# Altium PCB AIRZAI_LED_SENSE_FLEX_REVA.PcbDoc (part 1 of 2)
Units mil, origin at the board's own origin, x right, y up, seen from the top; angles counter-clockwise.
Board outline 2968.82 x 4325.31 mil, 2 copper layers (Top Layer, Bottom Layer); 51 components, 38 nets, 146 pads, 75 vias.
Unrouted connection lines stored in the file: 65.
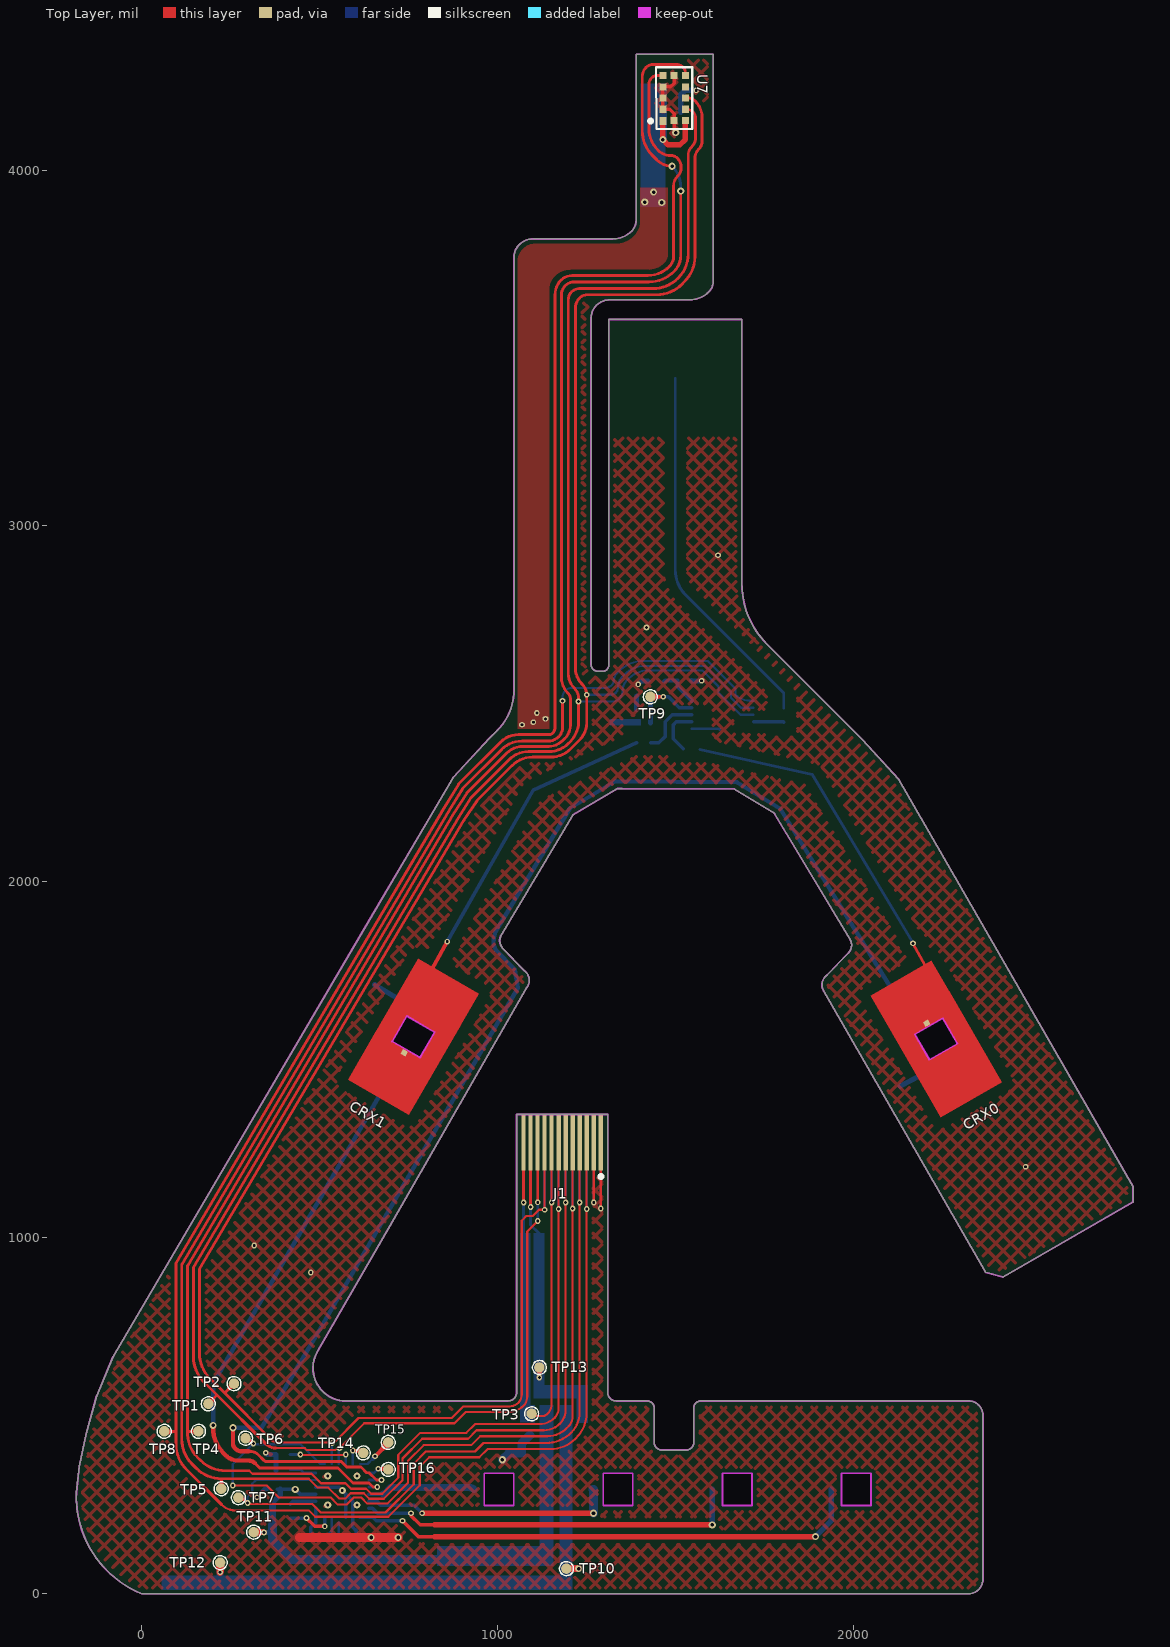
[diagram p0: Top Layer view]
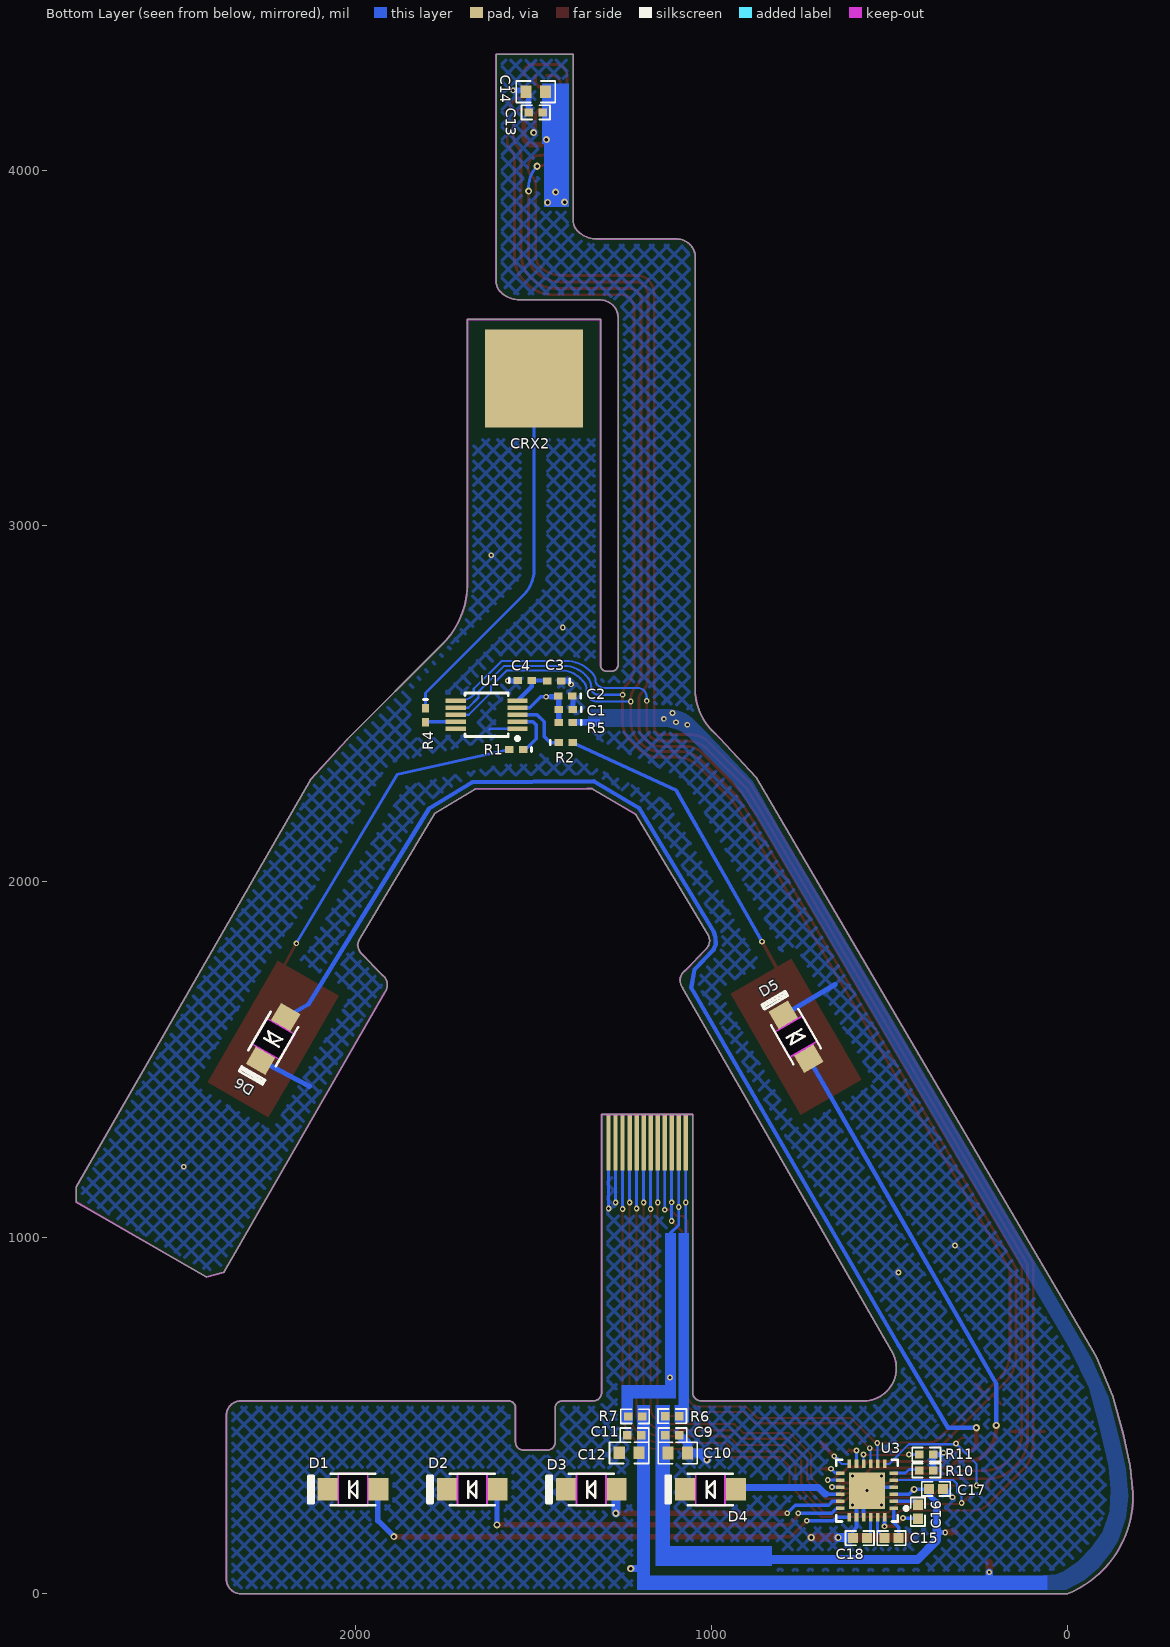
[diagram p1: Bottom Layer view, seen from below]
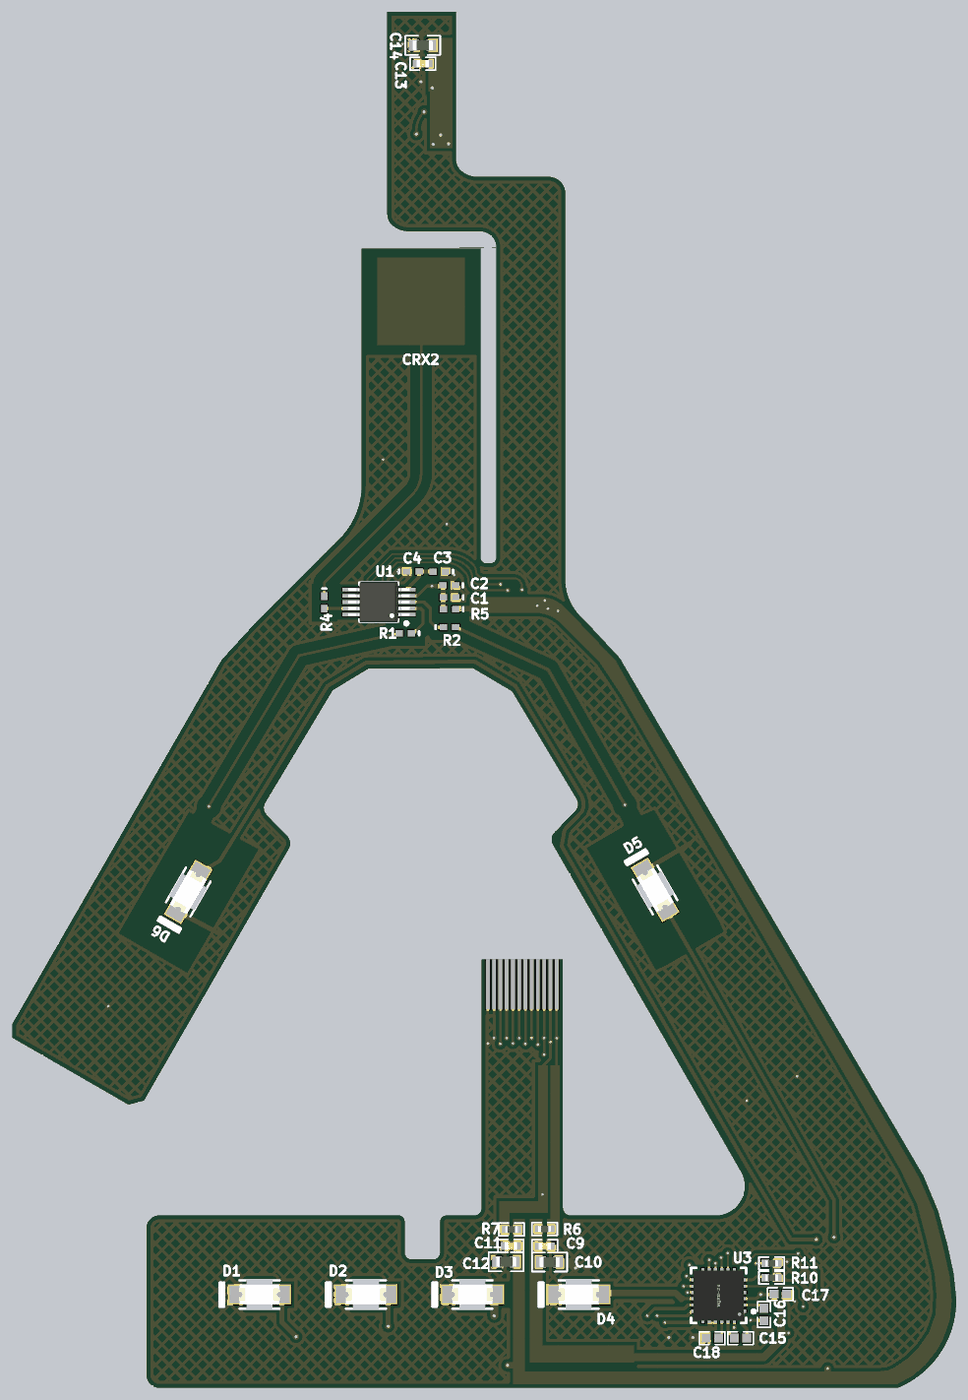
[diagram p3: 3D render of the assembled board from below, using the file's embedded part models]

## Layer stack, top to bottom
Top Solder: solder mask 0.4, Solder Resist, Dk 3.5
Top Layer: signal copper 1.4
Dielectric 1: dielectric 12.6, FR-4, Dk 4.8
Bottom Layer: signal copper 1.4
Bottom Solder: solder mask 0.4, Solder Resist, Dk 3.5

## Board outline
0,0.05 cw(c111.74,273.59) -183.56,283.87 -175.82,357.67 -155.82,450.67 -126.82,555.67 -80.5,666.24 653.96,1917.4 874.71,2293.44 977.95,2404.51 997.98,2424.54 ccw(c882.06,2540.46) 1045.99,2540.46 1045.99,2566.43 1045.99,3755.43 cw(c1095.33,3755.43) 1060.44,3790.31 cw(c1099.07,3751.69) 1099.07,3806.31 1323.33,3806.31 ccw(c1323.33,3881.43) 1376.44,3828.31 ccw(c1346.14,3858.61) 1388.99,3858.61 1388.99,4325.31 1605.53,4325.31 1605.53,3687.73 cw(c1562.68,3687.73) 1592.98,3657.43 cw(c1539.87,3710.54) 1539.87,3635.43 1315.61,3635.43 ccw(c1315.61,3580.8) 1276.98,3619.43 ccw(c1311.86,3584.55) 1262.53,3584.55 1262.53,2609.67 ccw(c1281.62,2610.76) 1279.79,2591.73 1296.42,2591.73 ccw(c1295.22,2608.47) 1311.97,2609.67 1311.97,3580.15 1685.99,3580.15 1685.99,2838.32 ccw(c1927.41,2838.32) 1756.7,2667.61 2024.31,2400 2126.58,2288.04 2344.06,1910.1 2785.18,1143.49 2785.18,1100.61 2420.99,890.99 2419.21,889.97 2371.12,902.93 1917.64,1691.01 cw(c1945.14,1710.92) 1925.23,1738.42 1985.58,1800.55 1991.58,1809.55 1994.58,1822.55 1991.58,1835.55 1777.54,2192.62 1664.98,2260.71 1349.99,2262.07 1342.93,2262.11 1335.87,2262.03 1212.79,2189.33 1008.19,1848.01 1008.24,1847.99 1005.24,1834.99 1008.24,1821.99 1014.24,1812.99 1074.59,1750.85 cw(c1054.68,1723.35) 1082.18,1703.45 697.75,1035.36 495.3,683.53 ccw(c574.01,634.2) 563.5,541.91 625.45,541.91 625.68,541.67 1029.79,541.67 ccw(c1029.3,565.55) 1053.18,566.03 1053.18,1346.67 1309.08,1346.67 1309.08,565.67 ccw(c1332.96,565.55) 1332.84,541.67 1419.87,541.67 cw(c1419.91,522.02) 1439.56,522.05 1439.56,425.37 ccw(c1461.52,425.64) 1461.79,403.67 1528.87,403.67 ccw(c1529.14,425.64) 1551.1,425.37 1551.1,522.05 cw(c1570.87,522.14) 1570.79,541.91 2321.18,541.91 2323.18,541.91 cw(c2323.18,501.91) 2363.18,501.91 2363.18,41 cw(c2322.18,41) 2322.18,0 2098.42,0
cut-out: 1966.13,247.95 2048.8,247.95 2048.8,338.5 1966.13,338.5
cut-out: 1631.48,247.95 1714.16,247.95 1714.16,338.51 1631.48,338.51
cut-out: 1296.83,247.95 1379.51,247.95 1379.51,338.5 1296.83,338.5
cut-out: 962.19,247.95 1044.87,247.95 1044.87,338.5 962.19,338.5
cut-out: 2213.11,1500.42 2172.02,1571.8 2250.49,1616.98 2291.59,1545.6
cut-out: 703.37,1551.94 781.85,1506.76 822.94,1578.13 744.47,1623.32
board region "Layer Stack Region 1": 1053.18,1188 1053.18,1346.67 1309.09,1346.67 1309.09,1187.77
board region "Layer Stack Region 1": 1388.99,4086 1388.99,4325.31 1605.53,4325.31 1605.53,4087
board region "fpc 2": 1309.09,639 1309.09,565.67 1309.32,563.21 1052.86,562.01 1053.18,566.03 1053.18,638.95
board region "fpc 1": 1053.18,1110.93 1053.18,1188 1309.09,1187.77 1309.09,1111
board region "Layer Stack Region 1": 1309.09,1111 1309.09,639 1053.18,638.95 1053.18,1110.93
board region "Layer Stack Region 1": 1311.97,3257 1311.97,3580.15 1685.99,3580.15 1685.99,3257
board region "electrode 2": 1685.99,2880 1685.99,2838.32 1686.28,2826.48 1688.6,2802.9 1693.22,2779.66 1700.1,2756.99 1700.14,2756.88 1311.97,2758.77 1311.97,2884.99
board region "electrode 1": 1311.97,3164 1311.97,3257 1685.99,3257 1685.99,3164
board region "Layer Stack Region 1": 1685.99,3164 1685.99,2880 1311.97,2884.99 1311.97,3164
board region Sensor: 1388.99,4006 1388.99,4086 1605.53,4087 1605.53,4006
board region "Layer Stack Region 1": 1605.53,4006 1605.53,3687.73 1605.53,3683.51 1603.88,3675.23 1600.65,3667.43 1595.96,3660.41 1592.98,3657.43 1587.75,3652.2 1575.45,3643.98 1561.78,3638.32 1547.26,3635.43 1539.87,3635.43 1315.61,3635.43 1310.25,3635.17 1299.75,3633.08 1289.86,3628.98 1280.95,3623.03 1276.98,3619.43 1273.73,3615.84 1268.36,3607.8 1264.65,3598.87 1262.77,3589.38 1262.53,3584.55 1262.53,2609.67 1263.02,2606.32 1265.72,2600.14 1270.39,2595.28 1276.47,2592.35 1279.79,2591.73 1296.42,2591.73 1299.67,2592.28 1305.52,2595.22 1309.81,2600.17 1311.88,2606.38 1311.97,2609.67 1311.97,2758.77 1700.14,2756.89 1709.17,2735.1 1720.33,2714.21 1733.5,2694.51 1748.53,2676.19 1756.7,2667.61 2024.31,2400 2126.59,2288.04 2344.06,1910.1 2785.18,1143.49 2785.18,1100.61 2420.99,890.99 2419.21,889.97 2371.12,902.93 1917.64,1691.01 1915.68,1693.72 1912.89,1699.8 1911.34,1706.3 1911.09,1712.98 1912.14,1719.59 1914.47,1725.86 1917.97,1731.55 1922.52,1736.46 1925.23,1738.42 1985.57,1800.55 1991.57,1809.55 1994.57,1822.55 1991.57,1835.55 1777.54,2192.62 1664.98,2260.71 1349.99,2262.07 1342.93,2262.11 1335.87,2262.03 1212.79,2189.33 1008.24,1847.98 1005.24,1834.99 1008.24,1821.99 1014.24,1812.99 1074.59,1750.85 1077.3,1748.89 1081.84,1743.99 1085.35,1738.29 1087.67,1732.02 1088.73,1725.42 1088.48,1718.74 1086.93,1712.23 1084.14,1706.15 1082.18,1703.45 697.75,1035.36 495.3,683.53 491.43,676.75 485.48,662.33 482.02,647.13 481.16,631.55 482.91,616.06 487.23,601.07 494,587.02 503.02,574.29 514.04,563.26 526.76,554.23 540.8,547.45 555.78,543.12 563.5,541.91 625.68,541.67 1029.79,541.67 1034.44,542.22 1042.97,545.96 1049.42,552.69 1052.81,561.37 1052.86,562.01 1309.31,563.21 1309.52,561.01 1313.04,552.39 1319.59,545.76 1328.18,542.15 1332.84,541.67 1419.87,541.67 1423.78,541.68 1431.01,538.7 1436.55,533.18 1439.55,525.96 1439.56,522.05 1439.56,425.37 1440.03,421.09 1443.41,413.21 1449.54,407.23 1457.5,404.04 1461.79,403.67 1528.87,403.67 1533.16,404.04 1541.12,407.23 1547.25,413.21 1550.63,421.09 1551.1,425.37 1551.1,522.05 1551.08,525.98 1554.06,533.26 1559.6,538.85 1566.85,541.89 1570.79,541.91 2321.18,541.91 2323.18,541.91 2327.12,541.91 2334.85,540.37 2342.13,537.36 2348.68,532.98 2354.25,527.41 2358.63,520.85 2361.64,513.57 2363.18,505.85 2363.18,501.91 2363.18,41 2363.18,36.96 2361.6,29.04 2358.51,21.58 2354.03,14.86 2348.32,9.15 2341.6,4.67 2334.14,1.58 2326.22,0 2322.18,0 2098.42,0 0,0.05 -13.89,5.73 -40.38,19.83 -65.31,36.55 -88.41,55.7 -109.45,77.1 -128.22,100.52 -144.52,125.72 -158.18,152.44 -169.07,180.41 -177.06,209.34 -182.09,238.93 -184.08,268.87 -183.56,283.87 -175.82,357.67 -155.82,450.67 -126.82,555.67 -80.5,666.24 653.96,1917.4 874.71,2293.44 977.95,2404.51 997.98,2424.54 1003.53,2430.37 1013.73,2442.81 1022.67,2456.18 1030.25,2470.37 1036.41,2485.23 1041.08,2500.63 1044.22,2516.41 1045.8,2532.42 1045.99,2540.46 1045.99,2566.43 1045.99,3755.43 1045.99,3760.29 1047.89,3769.82 1051.61,3778.8 1057.01,3786.88 1060.44,3790.31 1064.25,3794.12 1073.19,3800.1 1083.14,3804.21 1093.69,3806.31 1099.07,3806.31 1323.33,3806.31 1330.69,3806.68 1345.13,3809.55 1358.74,3815.18 1370.98,3823.36 1376.44,3828.31 1379.27,3831.43 1383.93,3838.41 1387.15,3846.18 1388.79,3854.41 1388.99,3858.61 1388.99,4006

## Design rules (kind name [scope] priority, off if disabled: settings)
Clearance Clearance_Board_Cutout_Electrodes [(InComponent('CRX0') OR InComponent('CRX1')) vs OnLayer('Multi-Layer')] p1: gap=0 ignorepadtopadclearanceinfootprint=FALSE
Clearance Clearance_Board_Cutout_Diodes [(InComponent('D1') OR InComponent('D2') OR InComponent('D3') OR InComponent('D4') OR InComponent('D5') OR InComponent('D6')) vs OnLayer('Multi-Layer')] p2: gap=0 ignorepadtopadclearanceinfootprint=FALSE
Clearance Clearance_Keepout [(OnLayer('Keep-Out Layer')) vs (InComponent('D1') OR InComponent('D2') OR InComponent('D3') OR InComponent('D4') OR InComponent('D5') OR InComponent('D6') OR InComponent('CRX0') OR InComponent('CRX1') OR InComponent('J1'))] p3: gap=0 ignorepadtopadclearanceinfootprint=FALSE
Clearance Clearance_GND_POLY_ELECTRODE [(InComponent('CRX0') OR InComponent('CRX1') OR InComponent('CRX2') OR InNet('NetCRX0_1') OR InNet('NetCRX1_1') OR InNet('NetCRX2_1') OR InNet('NetR4_2') OR InNet('NetR2_1') OR InNet('NetR1_1')) vs (InNet('GND') AND InPolygon)] p4: gap=30 ignorepadtopadclearanceinfootprint=FALSE
Clearance Clearance_POLYGON_KEEPOUT [(OnLayer('Keep-Out Layer')) vs (InNet('GND') AND InPolygon)] p5: gap=10 ignorepadtopadclearanceinfootprint=FALSE
Clearance Clearance_GND_POLY_REST [All vs (InNet('GND') AND InPolygon)] p6: gap=10 ignorepadtopadclearanceinfootprint=FALSE
Clearance [All] p7: gap=6 ignorepadtopadclearanceinfootprint=FALSE
MinimumSolderMaskSliver [All] p1: minsoldermaskwidth=1
PolygonConnect [All] p1: connectstyle=Direct reliefconductorwidth=10 reliefentries=4 polygonreliefangle="90 Angle" airgapwidth=10
RoomDefinition AIRZAI_LED_SENSE_FLEX_REVA [InComponentClass('AIRZAI_LED_SENSE_FLEX_REVA')] p1: confinementstyle=ConfineIn formatcopy=TRUE lockcomponents=FALSE outline -5819.02,-4170.05 8840.98,-4170.05 8840.98,5429.95 -5819.02,5429.95
RoutingVias [All] p1: holewidth=28 width=50 viastyle="Through Hole" minholewidth=8 minwidth=16 maxholewidth=28 maxwidth=50
SilkToSilkClearance [All] p1: silktosilkclearance=1
SilkToSolderMaskClearance [IsPad] p1: minsilkscreentomaskgap=2 clearancetoexposedcopper=TRUE
SolderMaskExpansion [All] p1: expansion=4
Width [All] p1: maxlimit=100 minlimit=6 preferedwidth=10
27 further rules are at their usual default settings.

## Components (designator, comment, footprint, x,y, rotation, side; value= is the part's Value field where it differs from the comment)
C1 "CAP 1uF 16V 0402(1005)" 0402-A 1409.86,2484.27 r0 bottom value=1uF
C2 "CAP 100pF 25V 0402(1005)" 0402-A 1410.84,2522.37 r0 bottom value=100pF
C3 "CAP 1uF 16V 0402(1005)" 0402-A 1442.14,2564.98 r0 bottom value=1uF
C4 "CAP 100pF 25V 0402(1005)" 0402-A 1525.17,2565.54 r180 bottom value=100pF
C9 "0.1µF" 0402CAP 1110.18,445.48 r180 bottom
C10 "10µF" 0603 1095.18,395.48 r180 bottom
C11 "0.1µF" 0402CAP 1216.98,445.95 r0 bottom
C12 "10µF" 0603 1231.98,395.95 r0 bottom
C13 "0.1µF" 0402CAP 1494.18,4161.67 r0 bottom
C14 "4.7µF" 0603 1494.18,4219.67 r180 bottom
C15 "CAP 1uF 16V 0402(1005)" CAPC0402(1005)60_M 494.55,156.37 r0 bottom value=1uF
C16 "CAP 1uF 16V 0402(1005)" CAPC0402(1005)60_M 420.68,230.43 r270 bottom value=1uF
C17 "CAP 1uF 16V 0402(1005)" CAPC0402(1005)60_M 369.5,294.6 r0 bottom value=1uF
C18 "CAP 1uF 16V 0402(1005)" CAPC0402(1005)60_M 583.55,156.37 r0 bottom value=1uF
CRX0 "CONTACT POINT 1" "CONTACT_POINT_1CM _SQ" 2231.8,1558.7 r300 top
CRX1 "CONTACT POINT 2" "CONTACT_POINT_1CM _SQ" 763.16,1565.04 r60 top locked
CRX2 "CONTACT POINT 3" CONTACT_POINT_0.7CM 1498.97,3414.67 r90 bottom
D1 "WHITE" LED1206_LTW-C230DS 2007.46,293.23 r0 bottom locked
D2 "WHITE" LED1206_LTW-C230DS 1672.82,293.23 r0 bottom locked
D3 "WHITE" LED1206_LTW-C230DS 1338.17,293.23 r0 bottom locked
D4 "WHITE" LED1206_LTW-C230DS 1003.53,293.23 r0 bottom locked
D5 "WHITE" LED1206_LTW-C230DS 763.16,1565.04 r60 bottom
D6 "WHITE" LED1206_LTW-C230DS 2231.8,1558.7 r300 bottom
J1 "FFC Pads" FFC_Pads 1181.13,1267.93 r0 top
R1 "470R" 0402-A 1548.98,2371.95 r0 bottom
R2 "470R" 0402-A 1409.98,2390.95 r180 bottom
R4 "470R" 0402-A 1803.85,2468.72 r270 bottom
R5 "43 R 1% 0402(1005)" 0402-A 1409.86,2447.46 r0 bottom value="43 R"
R6 "0R" 0402 1110.96,499.02 r180 bottom
R7 "0R" 0402 1215.07,498.18 r0 bottom
R10 "Jumper 0402(1005)" 0402 396.66,346.36 r0 bottom value=0R
R11 "Jumper 0402(1005)" 0402 396.66,391.36 r0 bottom value=0R
TP1 "Test Point" TP_0.9MM 187.18,533.67 r90 top
TP2 "Test Point" TP_0.9MM 259.18,590.46 r90 top
TP3 "Test Point" TP_0.9MM 1095.18,505.67 r90 top
TP4 "Test Point" TP_0.9MM 159.18,456.41 r90 top
TP5 "Test Point" TP_0.9MM 223.18,295.2 r90 top
TP6 "Test Point" TP_0.9MM 291.55,437.2 r90 top
TP7 "Test Point" TP_0.9MM 271.55,270.2 r90 top
TP8 "Test Point" TP_0.9MM 63.18,456.41 r90 top
TP9 "Test Point" TP_0.9MM 1428.98,2519.95 r90 top
TP10 "Test Point" TP_0.9MM 1193.18,70.67 r90 top
TP11 "Test Point" TP_0.9MM 314.55,173.2 r90 top
TP12 "Test Point" TP_0.9MM 220.18,87.67 r90 top
TP13 "Test Point" TP_0.9MM 1117.18,635.82 r90 top
TP14 "Test Point" TP_0.9MM 622.55,395.55 r90 top
TP15 "Test Point" TP_0.9MM 692.66,425.2 r90 top
TP16 "Test Point" TP_0.9MM 692.55,349.2 r90 top
U1 "IQS213A-80000008-MSR" MSOP-10-IQS213A-80000008-MSR 1632.17,2469.7 r0 bottom value="3 CH. CAPACITIVE TOUCH SENSOR WI"
U3 "LP55231SQE/NOPB" WQFN-24-LP55231SQE/NOPB 563.5,289.99 r0 bottom value="IC LED DRIVER RGLTR DIM 24WQFN"
U7 "VL53L0CXV0DH/1" VL53L0X 1495.68,4202.17 r270 top

## Footprints (in the part's own frame and the unit in brackets; to place one, negate y for a bottom-side part, rotate by r counter-clockwise, add the part's x,y. Pads: shape width x height; smd on the part's side, far side on the other; paste and mask are expansions set on the pad)
0402 [mm] "Chip Resistor, Body 1.1x0.5mm, IPC High Density"
  rect 0.6x0.6 smd: 1(-0.5,0) 2(0.5,0)
  silkscreen extent -1.02,-0.51 1.02,0.51, body extent -0.5,-0.25 0.5,0.25, height 0.27
0402-A [mm] "Chip Inductor, Body 1.0x0.5mm, IPC High Density"
  rect 0.6x0.5 smd: 1(-0.5,0) 2(0.5,0)
  silkscreen extent -1.1,-0.15 -1.1,0.15, body extent -0.55,-0.3 0.55,0.3, height 0.55
0402CAP [mm] "Chip Capacitor, Body 1.1x0.5mm, IPC High Density"
  rect 0.6x0.6 smd: 1(-0.5,0) 2(0.5,0)
  silkscreen extent -1.02,-0.51 1.02,0.51, body extent -0.5,-0.3 0.5,0.3, height 0.19
0603 [mm] "Chip Resistor, Body 1.6x0.8mm, IPC High Density"
  rect 0.8x0.9 smd: 1(-0.7,0) 2(0.7,0)
  silkscreen extent -1.4,-0.76 1.4,0.76, body extent -0.8,-0.41 0.8,0.4, height 0.37
CAPC0402(1005)60_M [mm] "Chip Capacitor, Body 1.0x0.5mm, Height 0.6mm, IPC Low Density"
  rect 0.72x0.72 smd: 1(-0.5,0) 2(0.5,0)
  silkscreen extent -1.02,-0.51 1.02,0.51, body extent -0.55,-0.3 0.55,0.3, height 0.6
CONTACT_POINT_0.7CM [mm]
  rect 7x7 smd paste-3.5 mask-3.5: 1(0,0)
"CONTACT_POINT_1CM _SQ" [mm]
  rect 0.4x0.4 smd paste-2 mask-2: 1(-1.312,-0.018)
  Top Layer region: -2.48,2.5 -1.05,1.15 1.05,1.15 1.05,-2.5 5,-2.5 5,2.5
  Top Layer region: 2.48,-2.5 1.05,-1.15 -1.05,-1.15 -1.05,2.5 -5,2.5 -5,-2.5
FFC_Pads [mm] "(0.50mm"
  rect 0.3x4 smd: 1(2.75,0) 2(2.25,0) 3(1.75,0) 4(1.25,0) 5(0.75,0) 6(0.25,0) 7(-0.25,0) 8(-0.75,0) 9(-1.25,0) 10(-1.75,0) 11(-2.25,0) 12(-2.75,0)
  rect 0.3x4 smd far side: 1(2.75,0) 2(2.25,0) 3(1.75,0) 4(1.25,0) 5(0.75,0) 6(0.25,0) 7(-0.25,0) 8(-0.75,0) 9(-1.25,0) 10(-1.75,0) 11(-2.25,0) 12(-2.75,0)
  silkscreen extent 2.64,-2.56 2.89,-2.31
LED1206_LTW-C230DS [mm] "Chip Capacitor, Body 3.2x1.6mm, IPC High Density"
  rect 1.5x1.6 smd paste-0.1 mask+0.07: 1(1.775,0) 2(-1.775,0)
  silkscreen extent -1.6,-1.13 3.19,1.13, body extent -1.63,-0.8 1.63,0.8, height 0.31
MSOP-10-IQS213A-80000008-MSR [mm]
  rect 1.45x0.3 smd mask+0.072: 1(-2.2,1) 2(-2.2,0.5) 3(-2.2,0) 4(-2.2,-0.5) 5(-2.2,-1) 6(2.2,-1) 7(2.2,-0.5) 8(2.2,0) 9(2.2,0.5) 10(2.2,1)
  silkscreen extent -2.32,-1.55 1.55,1.82, body extent -2.45,-1.6 2.45,1.6, height 0.96
TP_0.9MM [mm] "0.9MM DIA TESTPOINT"
  round 0.75 smd paste-5 mask+0.05: 1(0,0)
  silkscreen extent -0.5,-0.5 0.5,0.5
VL53L0X [mm]
  rect 0.58x0.5 smd: 1(1.64,-0.8)
  rect 0.5x0.5 smd: 2(0.8,-0.8) 3(0,-0.8) 4(-0.8,-0.8) 5(-1.6,-0.8) 6(-1.6,0) 7(-1.6,0.8) 8(-0.8,0.8) 9(0,0.8) 10(0.8,0.8) 11(1.6,0.8) 12(1.6,0)
  silkscreen extent -2.2,-1.79 2.2,1.3, body extent -2.2,-1.3 2.2,1.3, height 3.72
WQFN-24-LP55231SQE/NOPB [mm] "QFN, 24-Leads, Body 3.97x3.97mm, Pitch 0.50mm, Thermal Pad 2.60x2.60mm, IPC Medium Density"
  rect 0.6x0.25 smd: 1(-1.9,1.25) 2(-1.9,0.75) 3(-1.9,0.25) 4(-1.9,-0.25) 5(-1.9,-0.75) 6(-1.9,-1.25) 13(1.9,-1.25) 14(1.9,-0.75) 15(1.9,-0.25) 16(1.9,0.25) 17(1.9,0.75) 18(1.9,1.25)
  rect 0.25x0.6 smd: 7(-1.25,-1.9) 8(-0.75,-1.9) 9(-0.25,-1.9) 10(0.25,-1.9) 11(0.75,-1.9) 12(1.25,-1.9) 19(1.25,1.9) 20(0.75,1.9) 21(0.25,1.9) 22(-0.25,1.9) 23(-0.75,1.9) 24(-1.25,1.9)
  rect 2.6x2.6 smd: 25(0,0)
  silkscreen extent -2.92,-2.2 2.2,2.2, body extent -2.01,-2.01 2.01,2.01, height 0.8

## Part data
C1 C3 C15 C16 C17 C18: library part CAP, "CAP 1uF 16V ±10% 0402 (1005 Metric) Thickness 0.6mm SMD", Case-EIA=0402, Case-Metric=1005, Manufacturer="Taiyo Yuden", Manufacturer Part Number=JMK105C6105KV-F, Rated Voltage="6.3 V", Supplier Part Number 1=587-3381-1-ND, Tolerance=±10%, Max Thickness="0.6 mm", Note="CAP CER 1UF 6.3V X6S 0402", Pin Count=2, Supplier 1=Digi-Key, Technology=SMT
C2 C4: library part CAP, "CAP 100pF 25V ±2% 0402 (1005 Metric) Thickness 0.6mm SMD", Case-EIA=0402, Case-Metric=1005, Manufacturer=Yageo, Manufacturer Part Number=CC0402JRNPO9BN101, Rated Voltage="25 V", Supplier Part Number 1=311-1024-1-ND, Tolerance=±2%, Max Thickness="0.6 mm", Note="CAP CER 100PF 50V C0G/NPO 0402", Pin Count=2, Supplier 1=Digi-Key, Technology=SMT
C9 C11 C13: library part C0402-100n, "Capacitor, X7R, ±10%", Case-EIA=0402, Case-Metric=1005, Manufacturer=TDK, Manufacturer Part Number=C1005X7R1C104K, Rated Voltage="16 V", Supplier Part Number 1=445-4952-2-ND, Tolerance=±20%, Max Thickness="0.6 mm", Note="16V ±10% X7R", Pin Count=2, Supplier 1=Digi-Key, Technology=SMT
C10 C12: library part C0402-100n, "Capacitor, X7R, ±10%", Case-EIA=0603, Case-Metric=1608, Manufacturer=MURATA, Manufacturer Part Number=GRM188R60J106ME47D, Rated Voltage="6.3 V", Supplier Part Number 1=490-3896-6-ND, Tolerance=±20%, Max Thickness="0.9 mm", Note="6.3volts X5R 20%", Pin Count=2, Supplier 1=Digi-Key, Technology=SMT
C14: library part "C0603-1µ0 X7R", "Capacitor, X7R, ±10%", Case-EIA=0402, Case-Metric=1005, Manufacturer=TDK, Manufacturer Part Number=C1005X5R0J475M, Rated Voltage="6.3 V", Supplier Part Number 1=445-7395-2-ND, Tolerance=±20%, Max Thickness="0.6 mm", Note="6.3volts X5R 20%", Supplier 1=Digi-Key, Technology=SMT
CRX0 CRX1 CRX2: library part WIRE_POINT
D1 D2 D3 D4 D5 D6: library part LED_LTW-C230DS, Case-EIA=1206, Case-Metric=3216, Manufacturer=LITEON, Manufacturer Part Number=LTW-C230DS, Supplier Part Number 1=160-2221-1-ND, Max Thickness=1.10mm, Note="REVERSE MOUNT CHIP LED", Supplier 1=Digi-Key
J1: library part FFC_PADS, "0.5 mm Pitch FFC Pads", ComponentLink1URL=http://www.molex.com/molex/index.jsp, ComponentLink2Description=Datasheet, ComponentLink2URL=http://www.molex.com/webdocs/datasheets/pdf/en-us/0528921233_FFC_FPC_CONNECTORS.pdf, ComponentLink3Description="Package Specification", ComponentLink3URL=http://www.molex.com/pdm_docs/sd/528921233_sd.pdf, Note=DNP
R1 R2 R4: library part R0402-12k, "Resistor, ±1%, 0.063W", Case-EIA=0402, Case-Metric=1005, Manufacturer=Panasonic, Manufacturer Part Number=ERJ-2RKF4700X, Supplier Part Number 1=P470LTR-ND, Tolerance=±1%, Max Thickness="0.4 mm", Note="RES SMD 470 OHM 1% 1/10W 0402", Supplier 1=Digi-Key, Technology=SMT
R5: library part RES, "43R2 0.063W 1% 0402 (1005 Metric)  SMD", Case-EIA=0402, Case-Metric=1005, Manufacturer=Panasonic, Manufacturer Part Number=ERJ-2RKF43R0X, Power="0.063 W", Supplier Part Number 1=P43.0LCT-ND, Tolerance="1 %", Max Thickness="0.4 mm", Note="Res SMD 43 OHM 1% 1/10W 0402", Supplier 1=Digi-Key, Technology=SMT
R6: library part R0402-12k, "Resistor, ±1%, 0.063W", Case-EIA=0402, Case-Metric=1005, Manufacturer=Panasonic, Manufacturer Part Number=ERJ-2GE0R00X, Supplier Part Number 1=P0.0JTR-ND, Tolerance=None, Max Thickness="0.6 mm", Note="0.1W JUMPER", Pin Count=2, Supplier 1=Digi-Key, Technology=SMT
R7: library part R0402-12k, "Resistor, ±1%, 0.063W", Case-EIA=0402, Case-Metric=1005, Manufacturer=Panasonic, Manufacturer Part Number=ERJ-2GE0R00X, Supplier Part Number 1=P0.0JCT-ND, Tolerance=None, Max Thickness="0.6 mm", Note="0.1W JUMPER", Pin Count=2, Supplier 1=Digi-Key, Technology=SMT
R10 R11: library part RES, "Jumper 0402 (1005 Metric)", Case-EIA=0402, Case-Metric=1005, Manufacturer=Panasonic, Manufacturer Part Number=ERJ-2GE0R00X, Power=None, Supplier Part Number 1=P0.0JCT-ND, Max Thickness="0.6 mm", Note="0.1W JUMPER", Pin Count=2, Supplier 1=Digi-Key, Technology=SMT, Tolerance=None
U1: "Capacitive Touch Sensors 3 Ch Capacitive Touch/Swipe Function", Case-EIA=10-MSOP, Manufacturer=Azoteq, Manufacturer Part Number=IQS213A-00000000-MSR, Supplier Part Number 1=1790-1031-1-ND, Tolerance=None, Arrow Part Number=IQS213A-80000008-MSR, Datasheet Link=https://componentsearchengine.com/Datasheets/1/IQS213A-80000008-MSR.pdf, Geometry.Height=1.05mm, Manufacturer_Name=Azoteq, Manufacturer_Part_Number=IQS213A-80000008-MSR, Note="3 CH. CAPACITIVE TOUCH SENSOR WI", Pin Count=10, Supplier 1=Digi-Key, Technology=SMT
U3: "Imported", Case-EIA=24-WQFN, Manufacturer=TI, Supplier Part Number 1=296-39059-1-ND, Tolerance=None, Built_By=EMA_UL_Team, C="Copyright (C) 2016 Accelerated Designs. All rights reserved", Manufacturer_Part_Number=LP55231SQE/NOPB, Manufacturer Part Number=LP55231SQE/NOPB, Note="IC LED DRIVER RGLTR DIM 24WQFN", RefDes=RefDes, Supplier 1=Digi-Key, Technology=SMT, Type=DEV, Vendor="Texas Instruments"
U7: library part VL53L0X, Case-EIA=LGA12, Manufacturer=ST, Supplier Part Number 1=497-16538-1-ND, Tolerance=None, Manufacturer Part Number=VL53L0CXV0DH/1, Note="SENSOR LASER DISTANCE TOF 2M", Supplier 1=Digi-Key, Technology=SMT

## Via types
v1: diameter 16, hole 8, Top Layer to Bottom Layer, tented both sides, 53 vias
v2: diameter 20, hole 10, Top Layer to Bottom Layer, tented both sides, 17 vias
v3: diameter 20, hole 8, Top Layer to Bottom Layer, 5 vias

## Nets (pads, with @x,y where several pads share a name; then routed paths per layer and width w, separated by ;. In a path a pad name is that pad's centre, name@x,y a point inside that pad or via, vN(x,y) a via of type N, cw(c..) or ccw(c..) an arc to the next point about the centre after c; other vN are vias at no path point)
3V3: C11.1 C12.1 C13.1 C14.2 R5.1 R7.1 TP10.1 TP12.1 U7.1 U7.11 | length 310.1
  Top Layer w15: U7.1@1464.19,4137.61 v2(1464.19,4085.5) 1479.08,4070.61 1511.57,4070.61 1527.18,4086.21 U7.11@1527.18,4136.03
  Top Layer w20: v1(220.18,60.67) TP12.1@220.18,87.67 ; TP10.1@1193.18,70.67 v2(1227.34,70.67)
  Bottom Layer w20: v1(220.18,60.67) 220.18,26.09 ccw(c223.59,26.09) 221.18,23.67 ; 1193.18,70.67 v2(1227.34,70.67)
  other v1: 1068.27,2441.67 1100.18,2448.67 1134.18,2457.95 1110.18,2474.67
  other v2: 1460.98,3908.67 1413.18,3909.67 1438.18,3937.67
+5V: C9.1 C10.1 C17.2 R6.1 TP11.1 U3.3 | length 1116.3
  Top Layer w15: TP11.1@314.55,173.2 342.55,173.2 v1(343.55,172.2)
  Bottom Layer w10: C17.2@380.92,293.14 389.19,293.14 431.5,293.14 444.5,280.14 U3.3@488.69,280.14
  Bottom Layer w15: v1(343.55,172.2) 366.44,172.2 367.44,171.2 ; 367.44,255.92 389.19,277.67 389.19,293.14 C17.2@389.19,294.6
  Bottom Layer w20: 367.44,193.82 367.44,255.92
  Bottom Layer w25: 367.44,193.82 367.44,171.2 367.44,150.31 421.38,96.37 1141.22,96.37
  other v2: 431.22,293.42
D5: D5.2 U3.15 | length 1750.6
  Top Layer w8: 317.55,367.2 331.39,353.36 551.55,353.36 593.98,310.93 638.23,310.93 638.66,311.36 650.19,299.83 v1(661.66,299.83)
  Top Layer w12: v2(200.55,473.2) 200.55,465.46 ccw(c300.55,465.46) 229.84,394.74 235.39,389.2 ccw(c271.4,425.22) 271.4,374.28 300.45,374.28 cw(c300.45,350.1) 317.55,367.2
  Bottom Layer w8: U3.15@638.3,299.83 v1(661.66,299.83)
  Bottom Layer w12: v2(200.55,473.2) 200.55,590.46 D5.2@728.21,1504.52
D6: D6.2 U3.14 | length 3989.9
  Top Layer w8: 300.45,400.2 305.21,400.2 cw(c305.21,370.02) 326.55,391.36 342.94,374.97 ccw(c351.66,383.7) 351.66,371.36 560.55,371.36 576.13,355.78 615.97,355.78 631.55,340.2 638.55,340.2 659.24,319.51 v1(673.66,319.51)
  Top Layer w12: v2(256.35,466.53) 256.35,421.91 ccw(c274.1,421.91) 261.55,409.36 263.95,406.96 ccw(c280.28,423.3) 280.28,400.2 300.45,400.2
  Bottom Layer w8: U3.14@638.3,319.51 v1(673.66,319.51)
  Bottom Layer w12: v2(256.35,466.53) 336.21,466.53 474.18,697.67 1057.18,1702.67 1048.18,1753.67 994.18,1809.67 988.18,1825.67 989.18,1843.67 994.18,1859.67 1203.18,2206.67 1330.89,2282.73 1672.2,2279.67 1794.18,2205.67 2132.83,1656.19 D6.2@2196.86,1619.22
EN: J1.4 TP7.1 U3.5 | length 2374.9
  Top Layer w6: TP7.1@271.55,270.2 273.52,272.16 275.48,270.2 278.64,273.36 296.99,255.01 v1(297.55,255.01) ; v1@296.99,252.37 478.65,252.37 502.66,228.36 684.66,228.36 764.18,307.88 764.18,365.67 798.18,399.67 936.18,399.67 960.18,423.67 1135.82,423.67 ccw(c1135.82,523.67) 1206.53,452.96 ccw(c1149.04,510.45) 1230.34,510.45 v1(1230.34,1099.27) J1.4@1230.34,1267.93 J1.4@1230.34,1332.27
  Bottom Layer w6: v1(297.55,255.01) 297.55,272.22 310.53,285.2 310.53,309.15 320.89,319.51 U3.5@488.69,319.51
  Bottom Layer w8: v1(1230.34,1099.27) J1.4@1230.34,1267.93
GND: C1.1 C2.1 C3.1 C4.1 C9.2 C10.2 C11.2 C12.2 C13.2 C14.1 C17.1 C18.2 D1.1 D2.1 D3.1 D4.1 D5.1 D6.1 J1.1 J1.2 R10.1 R11.1 U1.1 U3.4 U3.20 U3.21 U3.25 U7.2 U7.3 U7.4 U7.6 U7.12 | length 2369.5
  Top Layer w8: v1(1269.71,1099.27) J1.2@1269.71,1267.93 ; v1@1289.4,1079.27 J1.1@1289.4,1267.93
  Top Layer w10: U7.6@1495.68,4265.17 1495.68,4244.18 1485.18,4233.67 U7.4@1464.19,4233.67 U7.3@1464.19,4202.17 U7.2@1464.19,4170.68 1483.17,4170.68 1495.68,4158.17 U7.12@1495.68,4139.18 1495.68,4109.67 v2(1500.18,4105.17)
  Top Layer w25: 442.55,158.2 v2(644.55,158.2) v2(720.18,158.2)
  Bottom Layer w8: v1(1269.71,1099.27) J1.2@1269.71,1267.93 ; v1(1289.4,1082.41) J1.1@1289.4,1269.07 ; U1.1@1545.55,2430.33 1621.59,2430.33 1623.98,2427.95
  Bottom Layer w10: U3.4@488.69,299.83 553.65,299.83 v3(563.5,289.99) U3.25@573.34,280.14 ; U3.21@573.34,215.18 U3.25@573.34,280.14 ; C18.2@603.24,156.37 603.24,176.51 593.02,186.73 U3.20@593.02,215.18 593.02,260.46 U3.25@573.34,280.14
  Bottom Layer w14: C1.1@1390.17,2484.27 1390.17,2521.38 C2.1@1391.16,2522.36 ; v1(1394.98,2554.95) 1405.01,2564.98 C3.1@1422.46,2564.98 ; C4.1@1544.85,2565.54 1545.45,2564.95 v1(1572.98,2564.95)
  Bottom Layer w15: v1(323.55,271.2) 346.96,294.6 C17.1@349.82,294.6 ; v1(348.26,396.2) 353.09,391.36 R11.1@376.98,391.36 R10.1@376.98,346.36 ; 654.38,1710.64 D5.1@798.1,1625.56 ; C13.2@1513.86,4161.67 1513.86,4211.8 C14.1@1521.74,4219.67 1525.74,4223.67 v1(1557.68,4223.67) ; 2130.18,1425.67 D6.1@2266.74,1498.18
  Bottom Layer w25: C18.2@603.24,156.37 605.06,158.2 v2(644.55,158.2) ; v2(1013.18,376.48) 1032.18,395.48 C10.2@1067.62,395.48 1067.62,422.6 C9.2@1090.5,445.48
  other v1: 474.87,902.67 316.18,978.67 2483.18,1199.67 1418.18,2714.67 1619.18,2917.67
  other v3: 522.55,249.04 604.44,249.04 522.55,330.93 604.44,330.93
INT: J1.5 TP6.1 U3.7 | length 2485.3
  Top Layer w6: v1(255.55,304.2) 350.99,304.2 384.83,270.36 530.55,270.36 549.71,251.2 576.55,251.2 595.71,270.36 616.66,270.36 633.66,253.36 689.66,253.36 748.18,311.88 748.18,373.67 792.18,417.67 925.9,417.67 950.9,442.67 1140.18,442.67 ccw(c1140.18,517.51) 1193.1,464.59 1199.18,470.67 ccw(c1171.46,498.39) 1210.66,498.39 v1(1210.66,1082.41) J1.5@1210.66,1267.93 ; TP6.1@291.55,437.2 298.55,437.2 v1(313.55,422.2)
  Bottom Layer w6: v1(255.55,304.2) v1(255.55,304.2) 255.63,364.27 v1(313.55,422.2) 315.56,420.19 445.88,420.19 501.29,364.79 U3.7@514.28,364.79
  Bottom Layer w8: v1(1210.66,1082.41) J1.5@1210.66,1269.07
NetC1_2: C1.2 C2.2 R5.2 TP9.1 U1.4 | length 239.7
  Top Layer w10: TP9.1@1428.98,2519.95 v1(1464.98,2519.95)
  Bottom Layer w10: 1452.24,2520.14 1479.79,2520.14 1510.54,2489.39 U1.4@1545.55,2489.39
  Bottom Layer w15: R5.2@1429.54,2447.46 C1.2@1429.54,2484.27 1429.54,2521.38 C2.2@1430.53,2522.36 ; C2.2@1429.93,2520.14 1452.24,2520.14
NetC15_1: C15.1 U3.1 | length 90.1
  Bottom Layer w10: C15.1@474.87,156.37 474.87,186.51 488.69,200.34 U3.1@488.69,240.77
NetC15_2: C15.2 U3.23 | length 67
  Bottom Layer w8: C15.2@514.24,156.37 533.97,176.1 U3.23@533.97,215.18
NetC16_1: C16.1 U3.2 | length 75.2
  Bottom Layer w10: C16.1@416.95,252.04 425.37,260.46 U3.2@488.69,260.46
NetC16_2: C16.2 U3.24 | length 135.8
  Top Layer w10: v1(462.66,212.67) 485.98,189.36 v1(514.28,189.36) v1@514.28,186.36
  Bottom Layer w10: C16.2@416.95,212.67 v1(462.66,212.67) ; v1(514.28,189.36) U3.24@514.28,215.18
NetC18_1: C18.1 U3.22 | length 47.5
  Bottom Layer w8: 553.65,200.85 553.65,163.58 C18.1@560.87,156.37
NetCRX0_1: CRX0.1 R1.2 | length 1111.3
  Top Layer w8: v1(2166.72,1827.4) 2222.18,1726.4 CRX0.1@2201.45,1607.02
  Bottom Layer w8: R1.2@1568.66,2371.95 1883.61,2301.53 v1@2167.12,1827.64
NetCRX1_1: CRX1.1 R2.2 | length 1226.4
  Top Layer w10: CRX1.1@733.12,1515.14 700.18,1508.67 681.18,1542.44 719.18,1644.67 792.18,1712.99 v1(858.5,1832.19)
  Bottom Layer w10: v1(858.5,1832.19) 1099.61,2257.25 R2.2@1390.29,2390.95
NetCRX2_1: CRX2.1 R4.1 | length 1048.2
  Bottom Layer w8: CRX2.1@1498.97,3414.67 1498.97,2877.02 ccw(c1598.97,2877.02) 1528.26,2806.31 1803.85,2530.71 R4.1@1803.85,2488.41
NetD1_2: D1.2 U3.19 | length 1453.8
  Top Layer w10: v1(732.66,205.36) 777.35,160.67 823.18,160.67
  Top Layer w15: 823.18,160.67 v2(1892.81,160.67)
  Bottom Layer w10: U3.19@612.71,215.18 648.68,215.18 658.5,205.36 v1(732.66,205.36)
  Bottom Layer w15: v2(1892.81,160.67) 1937.58,205.44 D1.2@1937.58,293.23
NetD2_2: D2.2 U3.18 | length 1088
  Top Layer w10: v1(756.66,226.36) 756.66,219.09 782.08,193.67 823.18,193.67
  Top Layer w15: 823.18,193.67 v2(1602.93,193.67)
  Bottom Layer w10: U3.18@638.3,240.77 648.09,240.77 662.5,226.36 v1(756.66,226.36)
  Bottom Layer w15: v2(1602.93,193.67) D2.2@1602.93,293.23
NetD3_2: D3.2 U3.17 | length 712.1
  Top Layer w15: v1(787.66,226.36) v2(1269.18,226.36)
  Bottom Layer w10: U3.17@638.3,260.46 659.56,260.46 670.98,249.04 764.98,249.04 v1(787.66,226.36)
  Bottom Layer w25: D3.2@1268.29,293.23 cw(c1266.13,291.08) 1269.18,291.08 v2(1269.18,226.36)
NetD4_2: D4.2 U3.16 | length 304.1
  Bottom Layer w10: U3.16@638.3,280.14 678.6,280.14
  Bottom Layer w20: 678.6,280.14 681.61,280.14 699.66,298.19 921.67,298.19 cw(c921.67,281.26) D4.2@933.64,293.23
NetJ1_8: J1.8 TP3.1 | length 1046.9
  Top Layer w6: TP3.1@1095.18,505.67 ccw(c1111.24,521.73) 1111.24,499.02 1124.12,499.02 ccw(c1124.12,521.73) 1140.18,505.67 ccw(c1112.6,533.25) 1151.6,533.25 v1(1151.6,1099.27) J1.8@1151.6,1267.93 J1.8@1151.6,1332.27
  Bottom Layer w8: v1(1151.6,1099.27) J1.8@1151.6,1267.93
NetJ1_11: J1.11 R7.2 TP13.1 | length 484.2
  Top Layer w8: v1(1092.55,1086.75) J1.11@1092.55,1267.93 ; v1(1117.18,607.82) TP13.1@1117.18,635.82
  Bottom Layer w8: J1.11@1092.55,1267.93 v1(1092.55,1086.75) 1092.55,1036.36 1116.12,1012.79 1116.12,1002.67
NetJ1_12: J1.12 R6.2 | length 430.6
  Top Layer w8: v1(1072.86,1099.27) J1.12@1072.86,1267.93
  Bottom Layer w8: 1072.86,1005.99 v1(1072.86,1099.27) J1.12@1072.86,1267.93
NetR1_1: R1.1 U1.2 | length 135.3
  Bottom Layer w10: R1.1@1521.22,2373.7 1492.98,2401.95 1492.98,2440.95 1502.05,2450.02 U1.2@1545.55,2450.02
NetR2_1: R2.1 U1.3 | length 172.5
  Bottom Layer w10: R2.1@1429.66,2390.95 1452.98,2390.95 1470.48,2408.45 1470.48,2449.45 1490.73,2469.7 U1.3@1545.55,2469.7
NetR4_2: R4.2 U1.9 | length 85.5
  Bottom Layer w10: U1.9@1718.78,2450.02 1802.87,2450.02 R4.2@1803.85,2449.04
NetR10_2: R10.2 U3.6 | length 75.6
  Bottom Layer w8: R10.2@417.24,349.2 445.82,349.2 455.82,339.2 U3.6@488.69,339.2
NetR11_2: R11.2 U3.10 | length 186.4
  Top Layer w6: v1(445.66,391.11) 446.41,390.36 v1@572.34,390.36
  Top Layer w8: v1@572.34,390.36 v1(573.34,391.36)
  Bottom Layer w6: U3.10@573.34,364.79 v1(573.34,391.36)
  Bottom Layer w8: R11.2@416.35,391.36 445.41,391.36 v1(445.66,391.11) ; v1(573.34,391.36) v1@573.34,393.36
NetTP14_1: TP14.1 U3.11 | length 69.9
  Top Layer w8: v1(593.02,402.36) 615.74,402.36 TP14.1@622.55,395.55
  Bottom Layer w8: U3.11@593.02,364.79 v1(593.02,402.36)
NetTP15_1: TP15.1 U3.12 | length 106.3
  Top Layer w12: v1(655.5,386.2) 662.16,392.85 TP15.1@692.66,425.2
  Bottom Layer w6: U3.12@612.71,364.79 634.09,364.79 648.85,379.55
  Bottom Layer w12: 648.85,379.55 v1(655.5,386.2) v1@656.03,386.72
NetTP16_1: TP16.1 U3.13 | length 60.1
  Top Layer w8: v1(664.55,351.2) 690.55,351.2 TP16.1@692.55,349.2
  Bottom Layer w8: U3.13@638.3,339.2 652.55,339.2 v1(664.55,351.2)
P0/TX: U1.10
SCL: J1.10 TP1.1 U1.8 U3.9 U7.10 | length 6917
  Top Layer w6: 377.55,409.36 457.66,409.36 462.66,404.36 544.66,404.36 549.41,409.11 v1(555.66,409.11) ; v1@555.54,409.23 625.32,479.02 878.53,479.02 910.18,510.67 1029.41,510.67 ccw(c1029.41,572.13) 1072.86,528.67 ccw(c1048.18,553.35) 1083.09,553.35 1083.09,1017.89 v1(1112.46,1047.27)
  Top Layer w8: 145.13,915.7 890.56,2181.51 926.18,2237.67 1031.63,2343.12 cw(c1087.06,2287.69) 1087.06,2366.08 1144.32,2366.08 ccw(c1144.32,2441.57) 1197.7,2388.19 1204.33,2394.83 ccw(c1149.18,2449.98) 1227.18,2449.98 v1(1227.18,2506.67) 1227.18,2515.7 ccw(c1186.21,2515.7) 1215.18,2544.67 cw(c1256.22,2585.71) 1198.18,2585.71 1198.18,3635.38 cw(c1229.71,3635.38) 1207.41,3657.67 cw(c1229.14,3635.94) 1229.14,3666.67 1435.76,3666.67 ccw(c1435.76,3766.67) 1506.47,3695.96 1507.6,3697.09 ccw(c1441.02,3763.67) 1535.18,3763.67 1535.18,4041.94 cw(c1565.91,4041.94) 1544.18,4063.67 ccw(c1515.21,4092.64) 1556.18,4092.64 1556.18,4145.77 ccw(c1532.28,4145.77) 1549.18,4162.67 ccw(c1529.85,4143.34) 1529.85,4170.68 U7.10@1527.18,4170.68 ; 145.18,915.67 145.18,665.99 ccw(c245.18,665.99) 174.47,595.28 211.18,558.57 ; TP1.1@187.18,533.67 211.18,558.57 ; 377.55,409.36 cw(c377.55,450.79) 348.26,421.49 211.18,558.57 ; J1.10@1112.23,1267.93 1112.46,1267.7 v1@1112.46,1099.27
  Bottom Layer w6: U3.9@553.65,364.79 v1@553.65,405.1 ; v1(1227.18,2506.67) 1323.12,2506.67 ccw(c1323.12,2531.23) 1340.49,2513.86 ccw(c1314.68,2539.67) 1351.18,2539.67 cw(c1385.65,2539.67) 1361.27,2564.04 1369.18,2571.95 cw(c1423.18,2517.95) 1423.18,2594.31 1574.98,2594.31 1620.3,2549 1620.3,2531.63 1682.22,2469.7 U1.8@1718.78,2469.7
  Bottom Layer w8: J1.10@1112.23,1267.93 1112.46,1267.7 v1(1112.46,1099.75) v1(1112.46,1047.27)